# Altium PCB PCB2.PcbDoc
Units mm, origin at the board's own origin, x right, y up, seen from the top; angles counter-clockwise.
Board outline 108.97 x 70.49 mm, 2 copper layers (Top Layer, Bottom Layer); 25 components, 23 nets, 110 pads, 6 vias.
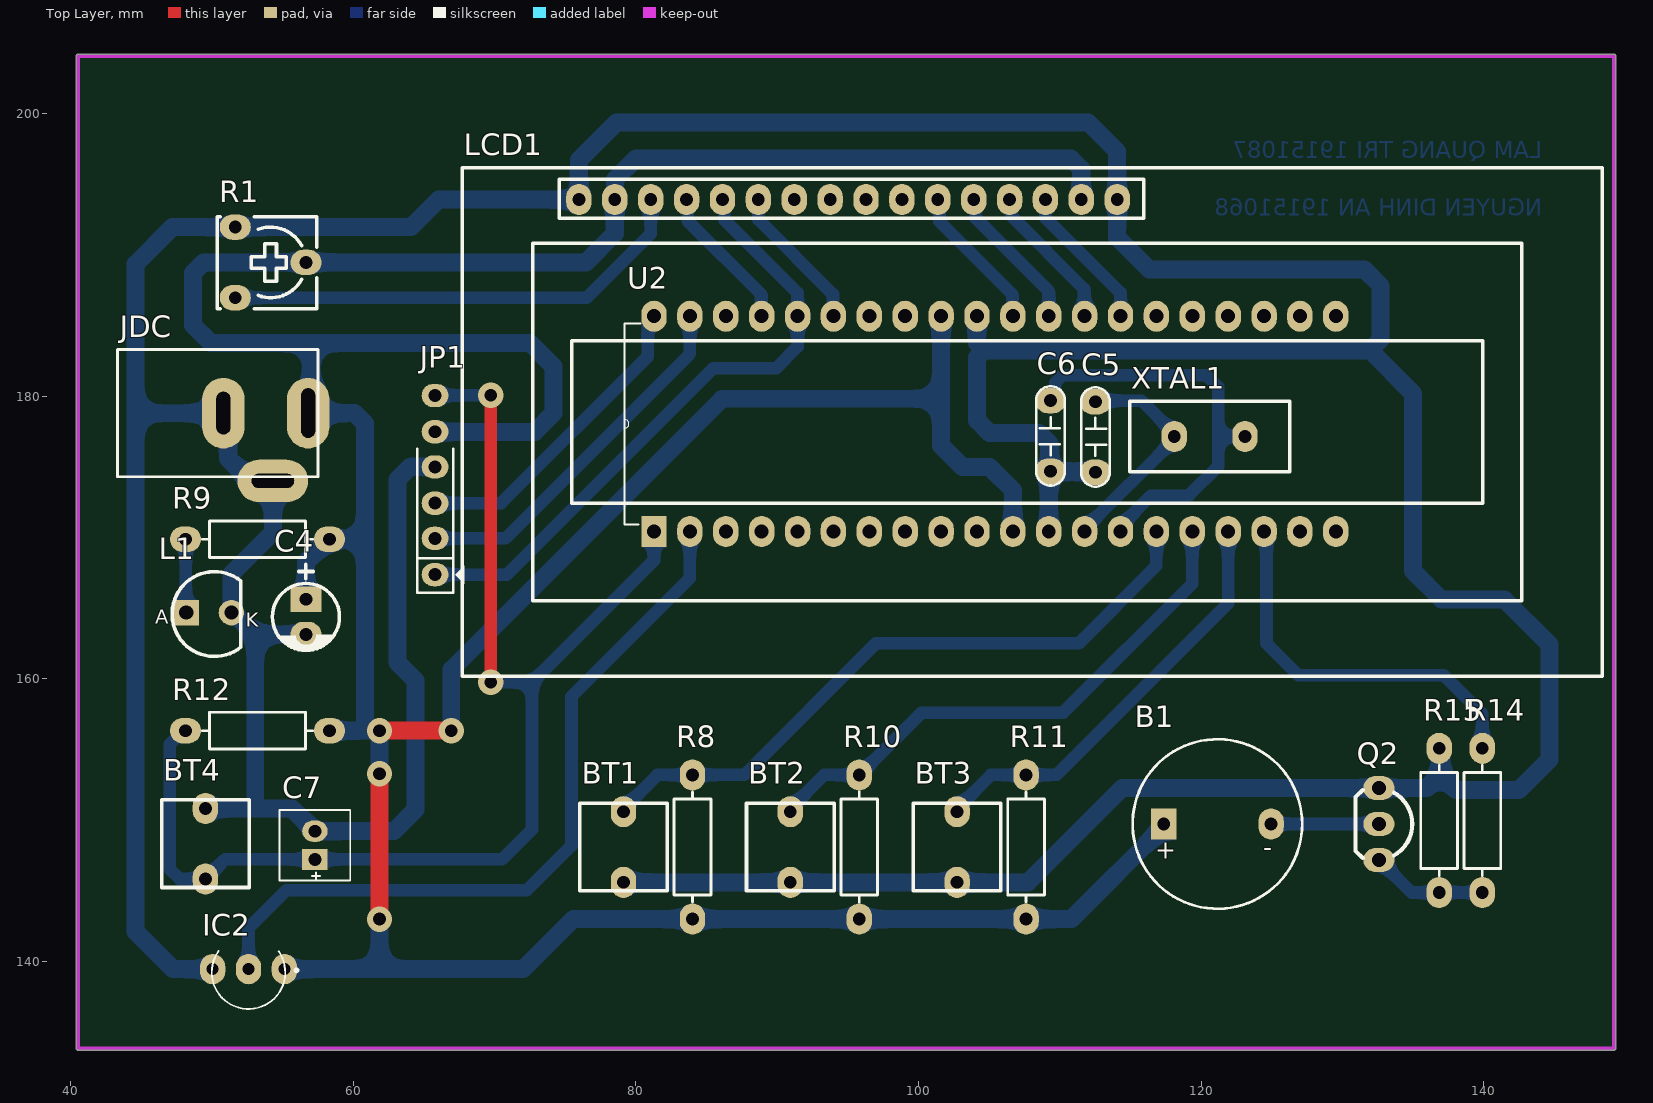
[diagram p0: Top Layer view]
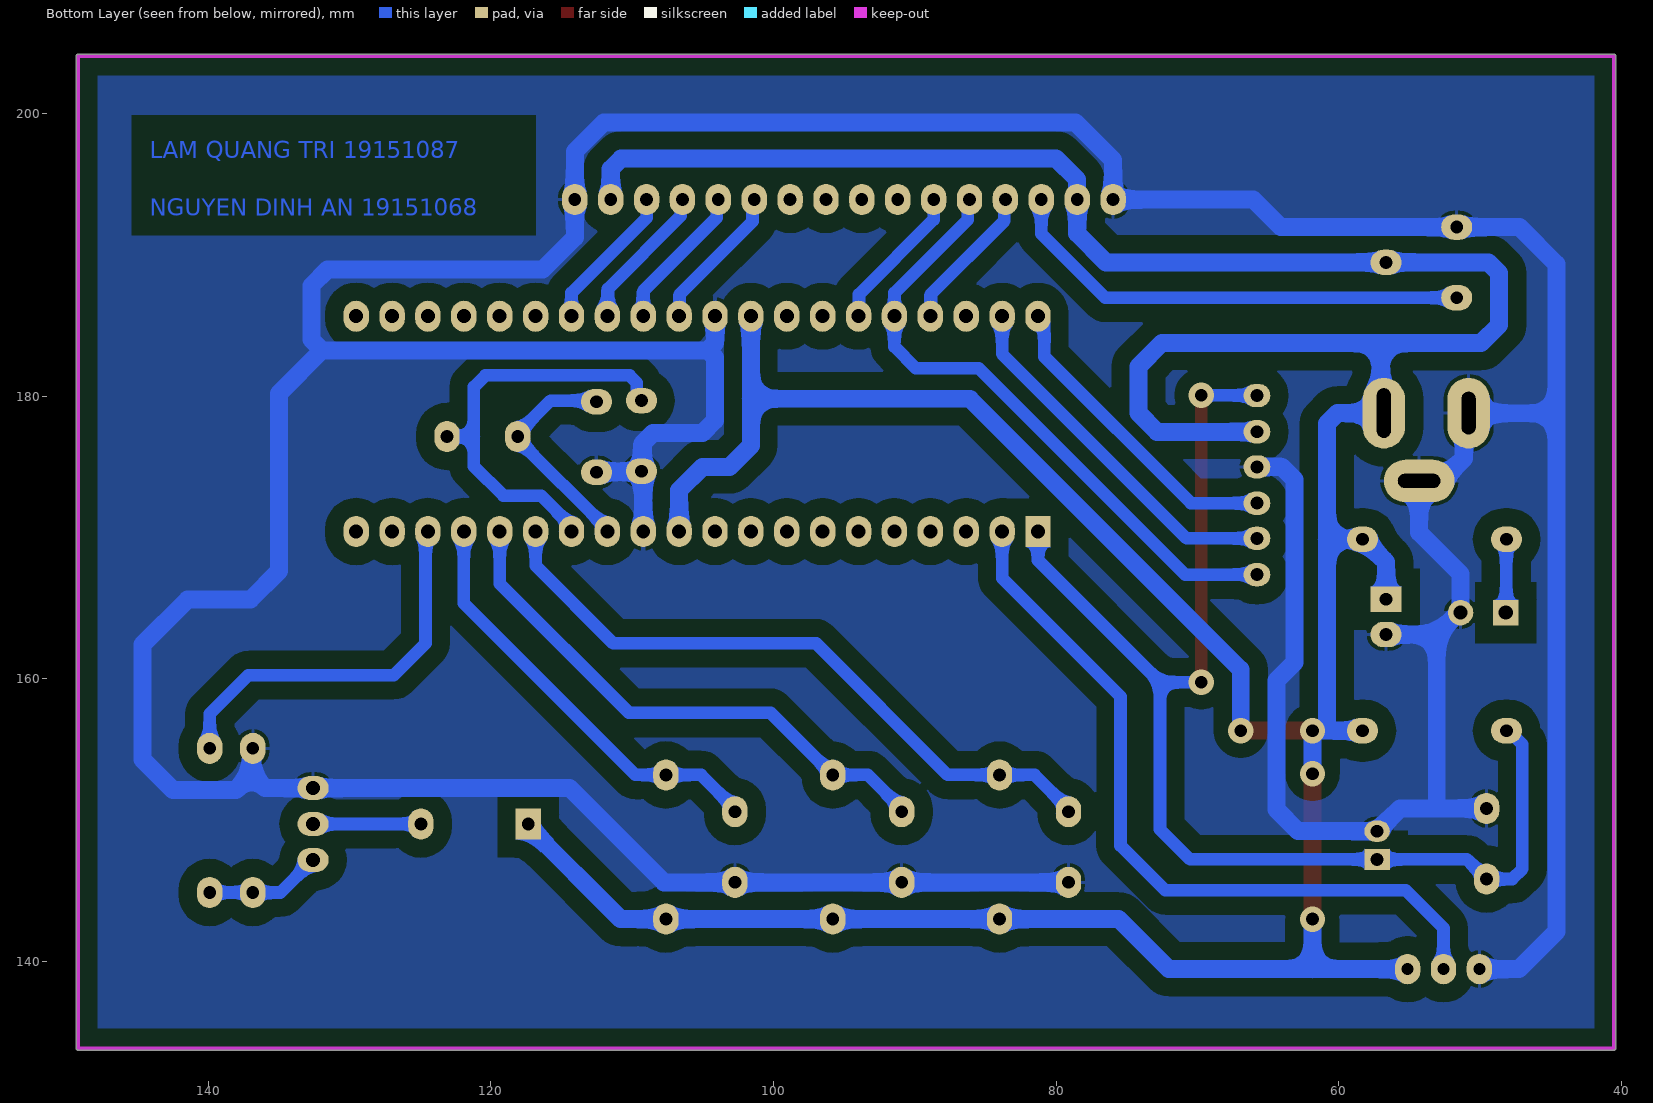
[diagram p1: Bottom Layer view, seen from below]
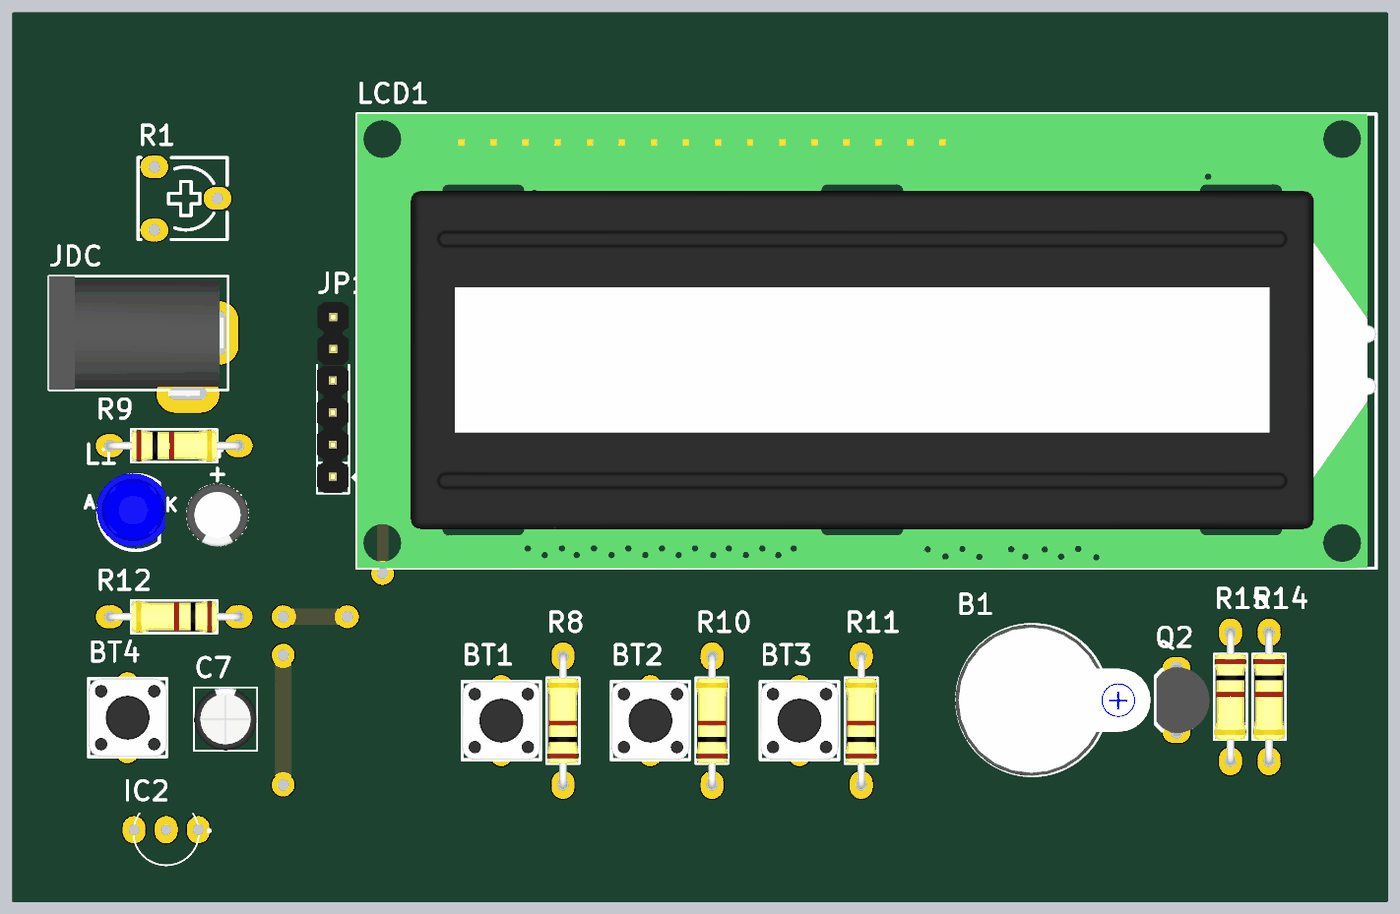
[diagram p2: 3D render of the assembled board from above, using the file's embedded part models]

## Layer stack, top to bottom
Top Solder: solder mask 0.0102, Solder Resist, Dk 3.5
Top Layer: signal copper 0.0356
Dielectric 1: dielectric 0.32, FR-4, Dk 4.8
Bottom Layer: signal copper 0.0356
Bottom Solder: solder mask 0.0102, Solder Resist, Dk 3.5

## Board outline
40.513,133.731 cw(c40.513,133.858) 40.386,133.858 40.386,204.089 cw(c40.513,204.089) 40.513,204.216 149.225,204.216 cw(c149.225,204.089) 149.352,204.089 149.352,133.858 cw(c149.225,133.858) 149.225,133.731

## Design rules (kind name [scope] priority, off if disabled: settings)
Clearance [All] p1: gap=0.406 ignorepadtopadclearanceinfootprint=TRUE
PolygonConnect [All] p1: connectstyle=Relief reliefconductorwidth=0.254 reliefentries=4 polygonreliefangle="90 Angle" airgapwidth=0.254
RoutingVias [All] p1: holewidth=0.711 width=1.27 viastyle="Through Hole" minholewidth=0.711 minwidth=1.27 maxholewidth=0.711 maxwidth=1.27
SolderMaskExpansion [All] p1: expansion=0.102 istentingtop=FALSE
Width [All] p1: maxlimit=1.27 minlimit=0.635 preferedwidth=0.889
30 further rules are at their usual default settings.

## Components (designator, comment, footprint, x,y, rotation, side; value= is the part's Value field where it differs from the comment)
B1 "Buzzer" Buzzer 121.158,149.733 r0 top
BT1 "BUTTON" BUTTON 79.121,148.104 r270 top
BT2 "BUTTON" BUTTON 90.926,148.104 r270 top
BT3 "BUTTON" BUTTON 102.731,148.104 r270 top
BT4 "BUTTON" BUTTON 49.53,148.336 r90 top
C4 "10uF25V" CAP10UF25V 56.642,164.396 r270 top
C5 "22pF" "CN4 5MMP" 111.192,179.965 r270 top
C6 "22pF" "CN4 5MMP" 110.677,174.365 r90 top
C7 "CAP100UF" "CAP 100UF 16V" 59.777,145.725 r90 top
IC2 "LM35" LM35 52.578,138.684 r180 top
JDC "Jac DC" DC-IN 43.3,174.316 r0 top
JP1 "JP6 PIN" JP_6PIN 65.786,169.926 r90 top value=JP7
L1 "Led Blue" Led__Blue_t/h_5mm 50.166,164.592 r0 top
LCD1 "LCD 16x2A" LCD1602 107.696,178.181 r0 top value=LCD16x2A
Q2 "C1815" 2SC1815 132.587,149.733 r270 top
R1 "POT - cuc ao" "POT - cuc ao 10k" 51.642,191.984 r270 top
R8 "4k7" R025W_AX04 84.002,148.104 r90 top
R9 "220R" R025W_AX04 53.213,169.887 r0 top
R10 "4k7" R025W_AX04 95.807,148.104 r90 top
R11 "4k7" R025W_AX04 107.613,148.104 r90 top
R12 "4k7" R025W_AX04 53.213,156.337 r180 top
R14 "1k" R025W_AX04 139.909,149.987 r270 top
R15 "10k" R025W_AX04 136.855,149.987 r270 top
U2 "PIC16F887A" PIC16F877A 129.54,185.674 r90 top
XTAL1 "CRYSTAL" Crystal 118.11,177.165 r0 top

## Footprints (in the part's own frame and the unit in brackets; to place one, negate y for a bottom-side part, rotate by r counter-clockwise, add the part's x,y. Pads: shape width x height; smd on the part's side, far side on the other; paste and mask are expansions set on the pad)
2SC1815 [mm] "TO-92 Body Dia. 4.5mm; Leads 0.51 x 0.48 mm (max)"
  oval 1.7x2.2 hole 1 mask+0.1: 1(-2.54,0) 2(0,0)
  oval 1.7x2.2 hole 1: 3(2.54,0)
  silkscreen extent -2.41,-1.65 2.41,2.37, body extent -2.79,-1.59 2.79,2.61, height 10
BUTTON [mm]
  oval 2.2x1.8 hole 0.9: 1(-2.5,0) 2(2.5,0)
  silkscreen extent -3.1,-3.1 3.1,3.1, body extent -3.1,-3.1 3.1,3.1, height 5.3
Buzzer [mm] "2PIN, 3.5mm pitch, 0.8mm pin width"
  rect 1.8x2.2 hole 0.9: 1(-3.8,0)
  oval 1.8x2.2 hole 0.9: 2(3.8,0)
  silkscreen extent -6,-6 6,6, body extent -6.08,-6.01 9.37,5.99, height 9.65
CAP10UF25V [mm]
  rect 1.8x2.2 hole 0.9: 1(-1.25,0)
  oval 1.8x2.2 hole 0.9: 2(1.25,0)
  silkscreen extent -3.71,-2.37 2.37,2.37, body extent -2.5,-2.5 2.5,2.5, height 11
"CAP 100UF 16V" [mm]
  rect 1.5x1.8 hole 0.9: 1(1.5,2.5)
  oval 1.5x1.8 hole 0.9: 2(3.5,2.5)
  silkscreen extent 0,0 5,5, body extent 0,0 5,5, height 11
"CN4 5MMP" [mm]
  oval 1.8x2.2 hole 0.9: 1(0.34,1.33) 2(5.34,1.33)
  silkscreen extent -0.67,0.31 6.35,2.35, body extent 0.03,0.09 5.69,2.54, height 6
Crystal [mm]
  oval 1.8x2.2 hole 0.9: 1(0,0) 2(5,0)
  silkscreen extent -3.17,-2.49 8.17,2.5, body extent -3.17,-2.5 8.18,2.5, height 3.68
DC-IN [mm] "Jac DC input"
  oval 3x5 hole 1 slot 3.5 at 90 deg: 1(13.5,4.5)
  oval 3x5 hole 1 slot 3 at 90 deg: 2(7.5,4.5)
  oval 5x3 hole 1 slot 3 at 0 deg: 3(11,-0.3)
  silkscreen extent 0,0 14.2,9, body extent 0,-0.5 13.83,9, height 11.02
JP_6PIN [mil] "JP_6PIN"
  oval 65x75 hole 36: 1(-100,0) 2(1,0) 3(99,0) 4(200,0) 5(298,0) 6(399,0)
  silkscreen extent -150,-81 250,50, body extent -148,-50 446,50, height 323
LCD1602 [mm]
  oval 1.8x2.2 hole 0.9: 1(-31.73,15.75) 2(-29.19,15.75) 3(-26.65,15.75) 4(-24.11,15.75) 5(-21.57,15.75) 6(-19.03,15.75) 7(-16.49,15.75) 8(-13.95,15.75) 9(-11.41,15.75) 10(-8.87,15.75) 11(-6.33,15.75) 12(-3.79,15.75) 13(-1.25,15.75) 14(1.29,15.75) 15(3.83,15.75) 16(6.37,15.75)
  silkscreen extent -40,-18 40.7,18, body extent -40,-18 40.7,18, height 19.3
Led__Blue_t/h_5mm [mm]
  rect 1.8x1.8 hole 1: 1(-2,0.1)
  round 1.8 hole 1: 2(1.2,0.1)
  silkscreen extent -3,-3 1.87,3, body extent -3.1,-2.7 2.3,3.1, height 8.92
LM35 [mm]
  oval 1.8x2.14 hole 0.85: 1(-2.54,-0.775) 2(0,-0.775) 3(2.54,-0.775)
  silkscreen extent -3.5,-2.08 2.6,2.04, body extent -2.29,-2.04 2.29,1.52, height 11.47
PIC16F877A [mm] "PIC16F877A"
  rect 2.2x1.8 hole 0.991: 1(-15.24,48.26)
  oval 2.2x1.8 hole 0.991: 2(-15.24,45.72) 3(-15.24,43.18) 4(-15.24,40.64) 5(-15.24,38.1) 6(-15.24,35.56) 7(-15.24,33.02) 8(-15.24,30.48) 9(-15.24,27.94) 10(-15.24,25.4) 11(-15.24,22.86) 12(-15.24,20.32) 13(-15.24,17.78) 14(-15.24,15.24) 15(-15.24,12.7) 16(-15.24,10.16) 17(-15.24,7.62) 18(-15.24,5.08) 19(-15.24,2.54) 20(-15.24,0) 21(0,0) 22(0,2.54) 23(0,5.08) 24(0,7.62) 25(0,10.16) 26(0,12.7) 27(0,15.24) 28(0,17.78) 29(0,20.32) 30(0,22.86) 31(0,25.4) 32(0,27.94) 33(0,30.48) 34(0,33.02) 35(0,35.56) 36(0,38.1) 37(0,40.64) 38(0,43.18) 39(0,45.72) 40(0,48.26)
  silkscreen extent -14.73,49.23 -0.51,50.34, body extent -15.88,-1.97 0.63,50.35, height 7.83
"POT - cuc ao 10k" [mm]
  oval 1.8x2.2 hole 0.9: 1(0,0) 2(2.5,5) 3(5,0)
  silkscreen extent -0.74,-1.28 5.77,5.77, body extent -0.73,-1.28 5.77,5.76, height 8
R025W_AX04 [mm] "RESISTOR 1/4 WATT, AXIAL0.4"
  oval 2.2x1.8 hole 0.9: 1(-5.1,0) 2(5.1,0)
  silkscreen extent -3.9,-1.3 3.9,1.3, body extent -5.38,-1.28 5.38,1.28, height 2.6

## Part data
C4: library part "CAP 10UF25V", "CAP 10UF 25V 4W7H2P"
C5 C6: library part "CAP CERAMIC"
C7: library part CAP100UF16V, "CAP100UF 16V 2P"
JDC: library part DCIN, "Jac DC input"
JP1: library part JP6
LCD1: library part LCD16x2A, "LCD dipslay 16 char, 2 line"
Q2: library part TRANS_NPN_C1815, "Trans NPN 50V 150mA TO-92", ComponentLink1Description=Datasheet, ComponentLink1URL="D:\Dropbox\Datasheets\Transistors\P Channel Bipolar\2SC1815.pdf", Unit Price=0.0143
R1: "10k"
R8 R9 R10 R11 R12 R14 R15: library part Res, "Res", Manufacturer="Generic Components", Class=Passive, Published=08/06/2000, Publisher="Altium Hobart Technology Centre", SubClass=R
U2: "PIC PIC16F Microcontroller IC 8-Bit 20MHz 14KB (8K x 14) FLASH 44-TQFP (10x10)"

## Via types
v1: diameter 1.8, hole 0.9, Top Layer to Bottom Layer, 6 vias

## Nets (pads, with @x,y where several pads share a name; then routed paths per layer and width w, separated by ;. In a path a pad name is that pad's centre, name@x,y a point inside that pad or via, vN(x,y) a via of type N, cw(c..) or ccw(c..) an arc to the next point about the centre after c; other vN are vias at no path point)
+5: B1.1 C4.1 IC2.1 JDC.1 JP1.5 LCD1.2 LCD1.15 R1.2 R8.1 R9.2 R10.1 R11.1 R12.1 U2.11 U2.32 | length 309.7
  Top Layer w1.27: v1(61.849,143.002) v1(61.849,153.289) ; v1(61.849,156.337) v1(66.929,156.337)
  Bottom Layer w1.27: IC2.1 61.849,139.459 ; C4.1 56.642,168.273 58.256,169.887 R9.2 60.833,169.887 ; R12.1 60.833,156.337 ; v1(61.849,143.002) 61.849,139.459 ; v1(61.849,153.289) v1(61.849,156.337) 60.833,156.337 ; JP1.5 72.847,177.495 74.168,178.816 74.168,182.118 72.517,183.769 57.023,183.769 ; v1(66.929,156.337) 66.929,160.655 86.106,179.832 101.6,179.832 ; U2.32 101.6,179.832 ; U2.11 106.68,173.355 105.029,175.006 103.124,175.006 101.6,176.53 101.6,179.832 ; LCD1.15 111.526,196.106 110.782,196.85 80.01,196.85 78.506,195.346 LCD1.2 78.506,191.536 76.454,189.484 R1.2 49.385,189.484 48.641,188.74 48.641,185.039 49.911,183.769 57.023,183.769 ; B1.1 117.358,149.533 110.829,143.004 R11.1 R10.1 R8.1 75.567,143.004 72.022,139.459 61.849,139.459 ; 57.023,183.769 57.023,179.039 JDC.1 60.089,178.816 60.833,178.072 60.833,169.887 ; 60.833,156.337 60.833,169.887
GND: BT1.2 BT2.2 BT3.2 BT4.2 C4.2 C5.2 C6.1 C7.2 IC2.3 JDC.2 JDC.3 JP1.4 L1.2 LCD1.1 LCD1.16 Q2.1 R1.1 R15.1 U2.12 U2.31 | length 407.3
  Top Layer w1.27: JDC.2@50.8,177.348 JDC.2
  Bottom Layer w1.27: BT4.2@49.703,151.209 49.703,151.009 BT4.2 53.086,150.836 ; IC2.3 47.233,139.459 44.577,142.115 44.577,178.805 ; JDC.2@50.789,178.805 44.577,178.805 ; JDC.2@50.8,178.284 51.131,177.953 51.131,175.61 52.394,174.347 53.969,174.347 JDC.3 54.3,170.378 51.366,167.444 L1.2 51.509,164.692 53.055,163.146 ; C4.2 53.055,163.146 ; JP1.4 64.008,175.006 63.119,174.117 63.119,161.163 64.389,159.893 64.389,150.749 62.865,149.225 C7.2 57.189,149.225 57.012,149.402 57.012,149.49 55.666,150.836 53.086,150.836 ; BT1.2 BT2.2 BT3.2 107.758,145.604 114.427,152.273 Q2.1 135.998,152.273 136.956,153.231 ; U2.31 104.14,183.782 104.661,183.261 ; U2.12 109.22,174.578 C6.1 ; C5.2@112.075,174.625 C5.2 112.482,174.665 109.387,174.665 C6.1 ; R15.1 136.956,154.986 136.956,153.231 ; 44.577,178.805 44.577,189.357 47.204,191.984 R1.1 64.095,191.984 66.042,193.931 LCD1.1 75.966,196.743 78.613,199.39 112.014,199.39 114.066,197.338 LCD1.16 114.066,191.242 116.332,188.976 131.572,188.976 132.715,187.833 132.715,184.023 131.953,183.261 ; 53.055,163.146 53.055,150.867 53.086,150.836 ; 104.661,183.261 104.14,182.74 104.14,178.308 105.029,177.419 108.535,177.419 109.279,176.675 109.279,174.773 C6.1 ; 104.661,183.261 131.953,183.261 ; 131.953,183.261 135.001,180.213 135.001,167.64 137.033,165.608 141.478,165.608 144.653,162.433 144.653,154.305 142.494,152.146 138.041,152.146 136.956,153.231
NetB1_2: B1.2 Q2.2 | length 7.6
  Bottom Layer w0.889: B1.2 Q2.2
NetL1_1: L1.1 R9.1 | length 5.2
  Bottom Layer w0.889: L1.1@48.14,164.719 R9.1@48.14,169.861
  Bottom Layer w1.27: R9.1 R9.1@48.14,169.861 ; L1.1@48.14,164.719 L1.1
NetLCD1_3: LCD1.3 R1.3 | length 33.7
  Bottom Layer w0.889: R1.3 76.533,186.984 81.046,191.497 LCD1.3
NetQ2_3: Q2.3 R14.2 R15.2 | length 8.3
  Bottom Layer w0.889: Q2.3 132.618,147.193 132.993,146.818 132.993,146.788 134.9,144.88 136.848,144.88 R15.2 R14.2
RA0: IC2.2 U2.2 | length 53.9
  Bottom Layer w0.889: IC2.2 52.578,142.367 55.245,145.034 72.263,145.034 75.438,148.209 75.438,158.75 83.82,167.132 U2.2
RB2: LCD1.6 U2.35 | length 10.5
  Bottom Layer w0.889: LCD1.6 88.666,192.512 93.952,187.226 93.952,185.702 U2.35
RB3: JP1.1 LCD1.5 U2.36 | length 45
  Bottom Layer w0.889: JP1.1 70.866,167.386 85.471,181.991 89.916,181.991 91.44,183.515 U2.36 91.44,187.325 86.248,192.517 86.248,193.809 LCD1.5
RB4: LCD1.4 U2.37 | length 10.5
  Bottom Layer w0.889: LCD1.4 83.667,193.85 83.667,192.431 88.872,187.226 88.872,185.702 U2.37
RB6: JP1.2 U2.39 | length 26.1
  Bottom Layer w0.889: JP1.2 70.764,169.951 83.82,183.007 U2.39
RB7: JP1.3 U2.40 | length 22.4
  Bottom Layer w0.889: JP1.3 70.46,172.441 80.824,182.805 80.824,184.772 81.28,185.227 U2.40
RC0: BT1.1 R8.2 U2.15 | length 47.5
  Bottom Layer w0.889: BT1.1 79.121,150.804 81.521,153.204 R8.2 87.672,153.204 96.994,162.526 111.345,162.526 116.84,168.021 U2.15
RC1: BT2.1 R10.2 U2.16 | length 38.9
  Bottom Layer w0.889: BT2.1 90.926,150.804 93.326,153.204 R10.2 100.21,157.607 110.236,157.607 119.38,166.751 U2.16
RC2: BT3.1 R11.2 U2.17 | length 30.5
  Bottom Layer w0.889: BT3.1 102.731,150.804 105.131,153.204 R11.2 109.77,153.204 121.92,165.354 U2.17
RC3: R14.1 U2.18 | length 27.8
  Bottom Layer w0.889: U2.18 124.634,170.26 124.634,162.513 126.873,160.274 137.16,160.274 139.909,157.525 R14.1
RD4: LCD1.14 U2.27 | length 10.5
  Bottom Layer w0.889: LCD1.14 108.986,192.639 114.3,187.325 U2.27
RD5: LCD1.13 U2.28 | length 10.5
  Bottom Layer w0.889: LCD1.13 106.568,193.809 106.568,192.771 111.732,187.607 111.732,185.702 U2.28
RD6: LCD1.12 U2.29 | length 10.5
  Bottom Layer w0.889: LCD1.12 104.028,193.809 104.028,192.644 109.22,187.452 U2.29
RD7: LCD1.11 U2.30 | length 10.5
  Bottom Layer w0.889: LCD1.11 101.488,193.809 101.488,192.39 106.652,187.226 106.652,185.702 U2.30
RST: BT4.1 C7.1 JP1.6 R12.2 U2.1 | length 89.6
  Top Layer w0.889: v1(69.723,159.766) v1(69.723,180.086)
  Bottom Layer w0.889: R12.2 47.966,156.337 46.99,155.361 46.99,146.558 47.712,145.836 BT4.1 50.919,147.225 C7.1 70.517,147.225 72.644,149.352 72.644,159.766 ; JP1.6 65.799,180.073 69.71,180.073 v1(69.723,180.086) ; v1(69.723,159.766) 72.644,159.766 ; U2.1 81.28,168.402 72.644,159.766
XT1: C5.1 U2.13 XTAL1.1 | length 16.2
  Bottom Layer w0.889: U2.13 111.76,170.615 118.11,176.965 118.11,177.365 115.77,179.705 112.602,179.705 C5.1
XT2: C6.2 U2.14 XTAL1.2 | length 30
  Bottom Layer w0.889: C6.2 109.347,179.802 109.67,180.126 109.67,180.962 110.191,181.483 120.396,181.483 121.205,180.674 121.205,177.165 ; U2.14 114.3,170.815 116.459,172.974 119.126,172.974 121.205,175.053 121.205,177.165 ; XTAL1.2 121.205,177.165
pads on no net: LCD1.7 LCD1.8 LCD1.9 LCD1.10 U2.3 U2.4 U2.5 U2.6 U2.7 U2.8 U2.9 U2.10 U2.19 U2.20 U2.21 U2.22 U2.23 U2.24 U2.25 U2.26 U2.33 U2.34 U2.38

## Polygon pours and split planes (outlines as drawn)
GND on Bottom Layer "GND_L02_P000" (solid, pour order 0): 40.513,204.089 40.513,133.858 149.225,133.858 149.225,204.089 145.415,204.089 145.415,193.04 119.38,193.04 119.38,199.898 145.415,199.898 145.415,204.089

## Keep-outs
Keep-Out Layer:
  lines w0.254: 40.513,133.858 149.225,133.858 149.225,204.089 40.513,204.089 40.513,133.858

## Other copper
Bottom Layer:
  text "LAM QUANG TRI 19151087 /  / NGUYEN DINH AN 19151068" at 144.145,192.405 h2.03

## Text inside footprints (layer, text, board x,y; h text height)
B1: Top Overlay "-" at 124.408,147.433 h1.3; Top Overlay "+" at 116.758,147.283 h1.3
L1: Top Overlay "A" at 45.966,163.892 h1; Top Overlay "K" at 52.366,163.692 h1
Q2: Mechanical 1 "E" at 132.206,152.527 h0.8 r270; Mechanical 1 "C" at 132.206,149.987 h0.8 r270; Mechanical 1 "B" at 132.206,147.447 h0.8 r270